# Altium PCB Board_routed.PcbDoc (part 1 of 4)
Units mm, origin at the board's own origin, x right, y up, seen from the top; angles counter-clockwise.
Board outline 115.4 x 92.5 mm, 2 copper layers (Top Layer, Bottom Layer); 95 components, 82 nets, 440 pads, 192 vias.
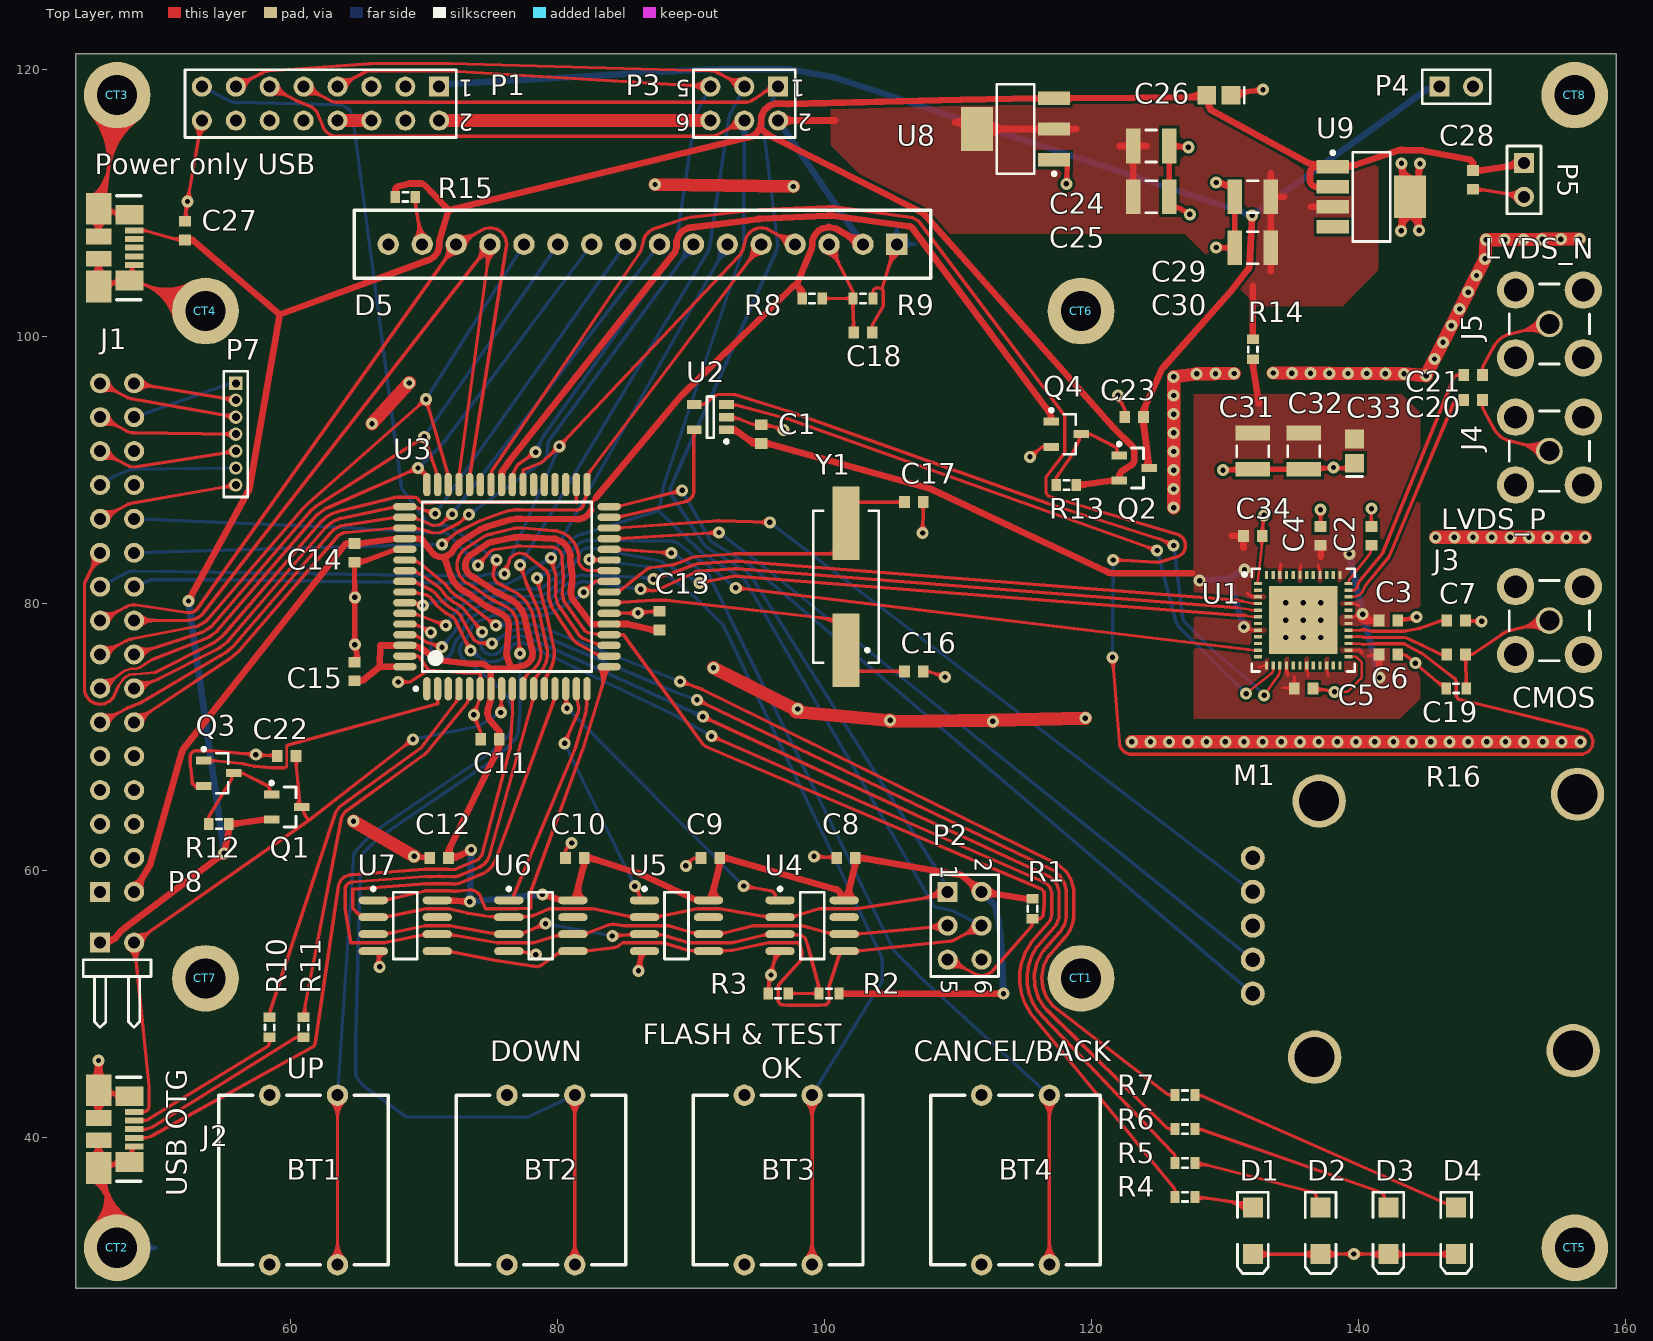
[diagram p0: Top Layer view]
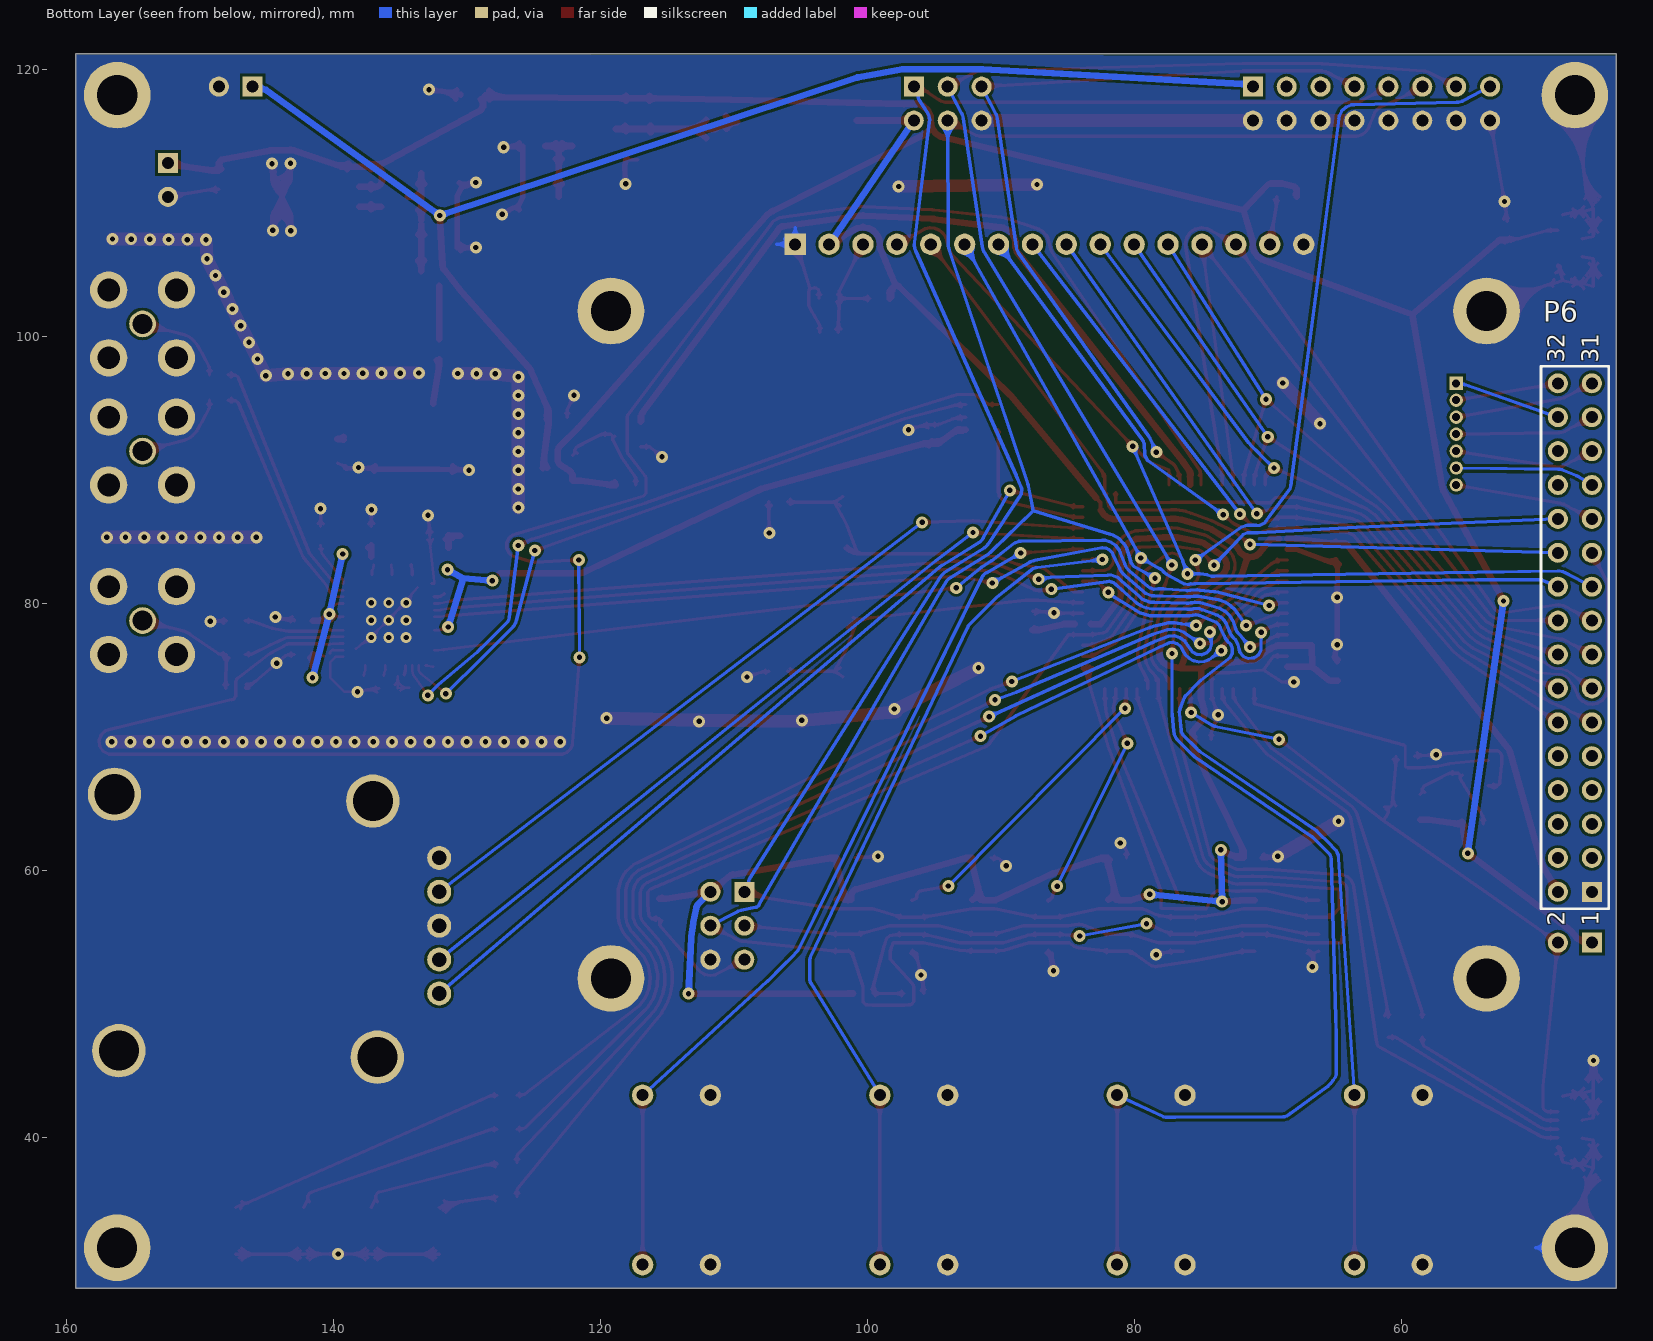
[diagram p1: Bottom Layer view, seen from below]

## Layer stack, top to bottom
Top Layer: signal copper 0.0356
Dielectric: dielectric 0.32, FR-4, Dk 4.8
Bottom Layer: signal copper 0.0356

## Board outline
43.9,28.7 159.3,28.7 159.3,121.2 43.9,121.2

## Design rules (kind name [scope] priority, off if disabled: settings)
Clearance [All] p1: gap=0.2
ComponentClearance [All] p1: gap=0.254 collisioncheckmode=3 verticalgap=0.254 showdistances=TRUE
HoleSize [All] p1: absolutevalues=TRUE maxlimit=5 minlimit=0.4 maxpercent=80.000 minpercent=20.000
PlaneClearance [All] p1: clearance=0.3
PolygonConnect [All] p1: connectstyle=Direct reliefconductorwidth=0.254 reliefentries=4 polygonreliefangle="45 Angle" airgapwidth=0.254
RoutingVias [All] p1: holewidth=0.4 width=0.9 viastyle="Through Hole" minholewidth=0.4 minwidth=0.9 maxholewidth=0.9 maxwidth=1.27
SilkscreenOverComponentPads [All] p1: minsilkscreentomaskgap=0.254
SolderMaskExpansion [All] p1: expansion=0.1
Width [All] p1: maxlimit=2 minlimit=0.2 preferedwidth=0.254
24 further rules are at their usual default settings.

## Classes and differential pairs
component class Connectors: BT1 BT2 BT3 BT4 C18 C19 C20 C21 CT1 CT2 CT3 CT4 CT5 CT6 CT7 CT8 D5 J1 J2 J3 J4 J5 M1 P1 P2 P3 P4 P5 P6 P7 P8 R8 R9 R10 R11 R16
component class ClockTamerMotherboard: C8 C9 C10 C11 C12 C13 C14 C15 C16 C17 D1 D2 D3 D4 R1 R2 R3 R4 R5 R6 R7 U3 U4 U5 U6 U7 Y1
component class Power: C22 C23 C24 C25 C26 C27 C28 C29 C30 C31 C32 C33 C34 Q1 Q2 Q3 Q4 R12 R13 R14 R15 U8 U9
component class ClockDiv: C1 C2 C3 C4 C5 C6 C7 U1 U2

## Components (designator, comment, footprint, x,y, rotation, side; value= is the part's Value field where it differs from the comment)
BT1 "DTS24N" DTS24N 63.5,30.48 r0 top
BT2 "DTS24N" DTS24N 81.28,30.48 r0 top
BT3 "DTS24N" DTS24N 99.06,30.48 r0 top
BT4 "DTS24N" DTS24N 116.84,30.48 r0 top
C1 "Cap Semi" 1608[0603] 95.25,92.71 r270 top
C2 "Cap Semi" 1608[0603] 140.97,85.09 r270 top
C3 "Cap Semi" 1608[0603] 142.24,78.74 r180 top
C4 "Cap Semi" 1608[0603] 137.16,85.09 r270 top
C5 "Cap Semi" 1608[0603] 135.89,73.66 r180 top
C6 "Cap Semi" 1608[0603] 142.24,76.2 r180 top
C7 "Cap Semi" 1608[0603] 147.32,78.74 r180 top
C8 "Cap Semi" 1608[0603] 101.6,60.96 r0 top
C9 "Cap Semi" 1608[0603] 91.44,60.96 r0 top
C10 "Cap Semi" 1608[0603] 81.28,60.96 r0 top
C11 "Cap Semi" 1608[0603] 74.93,69.85 r0 top
C12 "Cap Semi" 1608[0603] 71.12,60.96 r0 top
C13 "Cap Semi" 1608[0603] 87.63,78.74 r90 top
C14 "Cap Semi" 1608[0603] 64.77,83.82 r90 top
C15 "Cap Semi" 1608[0603] 64.77,74.93 r270 top
C16 "Cap Semi" 1608[0603] 106.68,74.93 r180 top
C17 "Cap Semi" 1608[0603] 106.68,87.63 r180 top
C18 "Cap Semi" 1608[0603] 102.87,100.33 r0 top
C19 "Cap Semi" 1608[0603] 147.32,76.2 r180 top
C20 "Cap Semi" 1608[0603] 148.59,95.25 r180 top
C21 "Cap Semi" 1608[0603] 148.59,97.155 r180 top
C22 "Cap Semi" 1608[0603] 59.69,68.58 r180 top
C23 "Cap Semi" 1608[0603] 123.19,93.98 r180 top
C24 "Cap Semi" C1210 124.46,114.3 r180 top
C25 "Cap Semi" C1210 124.46,110.49 r180 top
C26 "Tantal" C2512 129.54,118.11 r180 top
C27 "Cap Semi" 1608[0603] 52.07,107.95 r90 top
C28 "Cap Semi" 1608[0603] 148.59,111.76 r270 top
C29 "Cap Semi" C1210 132.08,110.49 r0 top
C30 "Cap Semi" C1210 132.08,106.68 r0 top
C31 "Cap Semi" C1210 132.08,91.44 r90 top
C32 "Cap Semi" C1210 135.89,91.44 r90 top
C33 "Tantal" C2512 139.7,91.44 r90 top
C34 "Cap Semi" 1608[0603] 132.08,85.09 r0 top
CT1 "MTHOLE_3mm" MTHOLE 119.21,51.934 r0 top locked
CT2 "MTHOLE_3mm" MTHOLE 46.99,31.75 r0 top
CT3 "MTHOLE_3mm" MTHOLE 46.99,118.11 r0 top
CT4 "MTHOLE_3mm" MTHOLE 53.61,101.934 r0 top locked
CT5 "MTHOLE_3mm" MTHOLE 156.21,31.75 r0 top
CT6 "MTHOLE_3mm" MTHOLE 119.21,101.934 r0 top locked
CT7 "MTHOLE_3mm" MTHOLE 53.61,51.934 r0 top locked
CT8 "MTHOLE_3mm" MTHOLE 156.2,118.11 r0 top
D1 "LED2" 3.2X1.6X1.1 132.08,33.02 r270 top
D2 "LED2" 3.2X1.6X1.1 137.16,33.02 r270 top
D3 "LED2" 3.2X1.6X1.1 142.24,33.02 r270 top
D4 "LED2" 3.2X1.6X1.1 147.32,33.02 r270 top
D5 "WH1604B" WH1604B 105.41,106.934 r0 top
J1 "47346-0001" USB_MICRO 48.26,106.68 r90 top
J2 "47346-0001" USB_MICRO 48.26,40.64 r90 top
J3 "SMA" SMA 154.305,78.74 r0 top
J4 "SMA" SMA 154.305,91.44 r0 top
J5 "SMA" SMA 154.305,100.965 r0 top
M1 "EPS1D-F19" EPS1D-F19 132.08,55.88 r270 top
P1 "Header 8X2" HDR2X8 71.12,118.745 r180 top
P2 "Header 3X2" HDR2X3 109.22,58.42 r270 top
P3 "Header 3X2" HDR2X3 96.52,118.745 r180 top
P4 "Header 2" HDR1X2 146.05,118.745 r0 top
P5 "Header 2" HDR1X2 152.4,113.03 r270 top
P6 "Header 16X2" HDR2X16 45.72,58.42 r90 bottom
P7 "MHDR1X7" MHDR1X7 55.88,96.52 r270 top
P8 "Header 2H" HDR1X2H 45.72,54.61 r0 top
Q1 "IRLML6402" SOT-23_N 59.69,64.77 r0 top
Q2 "IRLML6402" SOT-23_N 123.19,90.17 r0 top
Q3 "IRLML2502" SOT-23_N 54.61,67.31 r0 top
Q4 "IRLML2502" SOT-23_N 118.11,92.71 r0 top
R1 "Res3" J1-0603 115.57,57.15 r90 top
R2 "Res3" J1-0603 100.33,50.8 r180 top
R3 "Res3" J1-0603 96.52,50.8 r0 top
R4 "Res3" J1-0603 127,35.56 r180 top
R5 "Res3" J1-0603 127,38.1 r180 top
R6 "Res3" J1-0603 127,40.64 r180 top
R7 "Res3" J1-0603 127,43.18 r180 top
R8 "Res3" J1-0603 99.06,102.87 r180 top
R9 "Res3" J1-0603 102.87,102.87 r180 top
R10 "Res3" J1-0603 58.42,48.26 r90 top
R11 "Res3" J1-0603 60.96,48.26 r90 top
R12 "Res3" J1-0603 54.61,63.5 r0 top
R13 "Res3" J1-0603 118.11,88.9 r0 top
R14 "Res3" J1-0603 132.08,99.06 r90 top
R15 "Res3" J1-0603 68.58,110.49 r180 top
R16 "Res3" J1-0603 147.32,73.66 r180 top
U1 "LMK03000CISQ" SQ48A-04 135.86,78.77 r0 top
U2 "DS90LT012AQMF" MF05A_N 91.44,93.98 r180 top
U3 "AT90USB1287-AU" 64MD_N 76.2,81.28 r90 top
U4 "AT25256AN-10SQ-2.7" 8S1_N 99.06,55.88 r0 top
U5 "AT25256AN-10SQ-2.7" 8S1_N 88.9,55.88 r0 top
U6 "AT25256AN-10SQ-2.7" 8S1_N 78.74,55.88 r0 top
U7 "AT25256AN-10SQ-2.7" 8S1_N 68.58,55.88 r0 top
U8 "LM1117IMPX-3.3" MP04A_N 114.3,115.57 r180 top
U9 "LP3871EMP-3.3" MP05A_N 140.97,110.49 r0 top
Y1 "HC49/4H_SMX" HC49/4H_SMX 101.6,81.28 r90 top

## Footprints (in the part's own frame and the unit in brackets; to place one, negate y for a bottom-side part, rotate by r counter-clockwise, add the part's x,y. Pads: shape width x height; smd on the part's side, far side on the other; paste and mask are expansions set on the pad)
3.2X1.6X1.1 [mm] "SMT LED; 2 Flat Leads"
  rect 1.5x1.5 smd: 1(-1.75,0) 2(1.75,0)
  silkscreen extent -2.9,-1.15 3.2,1.15
8S1_N [mm] "SOIC, 8-Leads, Body 4.9x3.9mm, Pitch 1.27mm, IPC Medium Density"
  oval 2.2x0.6 smd: 1(-2.4,1.905) 2(-2.4,0.635) 3(-2.4,-0.635) 4(-2.4,-1.905) 5(2.4,-1.905) 6(2.4,-0.635) 7(2.4,0.635) 8(2.4,1.905)
  silkscreen extent -2.52,-2.5 0.9,2.88, body extent -2,-2.5 2,2.5, height 1.75
64MD_N [mm] "Thin QFP, 64-Leads, Body 14x14mm, Pitch 0.8mm, IPC Medium Density"
  oval 1.75x0.55 smd: 1(-7.65,6) 2(-7.65,5.2) 3(-7.65,4.4) 4(-7.65,3.6) 5(-7.65,2.8) 6(-7.65,2) 7(-7.65,1.2) 8(-7.65,0.4) 9(-7.65,-0.4) 10(-7.65,-1.2) 11(-7.65,-2) 12(-7.65,-2.8) 13(-7.65,-3.6) 14(-7.65,-4.4) 15(-7.65,-5.2) 16(-7.65,-6) 33(7.65,-6) 34(7.65,-5.2) 35(7.65,-4.4) 36(7.65,-3.6) 37(7.65,-2.8) 38(7.65,-2) 39(7.65,-1.2) 40(7.65,-0.4) 41(7.65,0.4) 42(7.65,1.2) 43(7.65,2) 44(7.65,2.8) 45(7.65,3.6) 46(7.65,4.4) 47(7.65,5.2) 48(7.65,6)
  oval 0.55x1.75 smd: 17(-6,-7.65) 18(-5.2,-7.65) 19(-4.4,-7.65) 20(-3.6,-7.65) 21(-2.8,-7.65) 22(-2,-7.65) 23(-1.2,-7.65) 24(-0.4,-7.65) 25(0.4,-7.65) 26(1.2,-7.65) 27(2,-7.65) 28(2.8,-7.65) 29(3.6,-7.65) 30(4.4,-7.65) 31(5.2,-7.65) 32(6,-7.65) 49(6,7.65) 50(5.2,7.65) 51(4.4,7.65) 52(3.6,7.65) 53(2.8,7.65) 54(2,7.65) 55(1.2,7.65) 56(0.4,7.65) 57(-0.4,7.65) 58(-1.2,7.65) 59(-2,7.65) 60(-2.8,7.65) 61(-3.6,7.65) 62(-4.4,7.65) 63(-5.2,7.65) 64(-6,7.65)
  silkscreen extent -7.77,-6.35 6.35,6.95, body extent -7,-7 7,7, height 1.2
1608[0603] [mm] "Chip Capacitor, Body 1.6x0.8mm, IPC High Density"
  rect 0.8x0.9 smd: 1(-0.7,0) 2(0.7,0)
  body extent -0.87,-0.48 0.87,0.48, height 1.3
C1210 [mm] "Chip Capacitor, Body 3.2x2.5mm, IPC High Density"
  rect 1.1x2.6 smd: 1(-1.35,0) 2(1.35,0)
  silkscreen extent -0.4,-1.2 0.4,1.2, body extent -1.7,-1.35 1.7,1.35, height 1.3
C2512 [mm] "Chip Capacitor, Body 2.54x1.27mm, IPC High Density"
  rect 1.4x1.4 smd: 1(-0.9,0) 2(0.9,0)
  silkscreen extent -1.9,-0.6 -1.9,0.6, body extent -1.45,-0.82 1.45,0.82, height 1.3
DTS24N [mm]
  round 1.6 hole 0.9: 1(0,12.7) 2(0,0) 3(-5.08,12.7) 4(-5.08,0)
  silkscreen extent -8.89,0 3.81,12.7
EPS1D-F19 [mm]
  round 1.8 hole 1.1: 1(5.08,0) 2(2.54,0) 3(0,0) 4(-2.54,0) 5(-5.08,0)
  round 4 hole 3: DP0(-9.34,4.97) DP1(-9.85,24.33) DP2(9.36,24) DP3(9.85,4.63)
HC49/4H_SMX [mm] "Surface Mount Quartz Crystal; Body 13.4 (inc. leads) x 4.9 mm (LxW max)"
  rect 5.5x2 smd: 1(-4.75,0) 2(4.75,0)
  silkscreen extent -5.7,-2.45 5.7,2.45
HDR1X2 [mm] "Connector; Header; 2 Position"
  rect 1.5x1.5 hole 0.9: 1(0,0)
  round 1.5 hole 0.9: 2(2.54,0)
  silkscreen extent -1.27,-1.27 3.81,1.27
HDR1X2H [mm] "Connector; Header; 2 Position; Right Angle"
  rect 1.5x1.5 hole 0.9: 1(0,0)
  round 1.5 hole 0.9: 2(2.54,0)
  silkscreen extent -1.27,-6.35 3.81,-1.27
HDR2X3 [mm] "Connector; Header; 3x2 Position"
  rect 1.5x1.5 hole 0.9: 1(0,0)
  round 1.5 hole 0.9: 2(0,2.54) 3(2.54,0) 4(2.54,2.54) 5(5.08,0) 6(5.08,2.54)
  silkscreen extent -1.27,-1.27 6.35,3.81
HDR2X8 [mm] "Connector; Header; 8x2 Position"
  rect 1.5x1.5 hole 0.9: 1(0,0)
  round 1.5 hole 0.9: 2(0,2.54) 3(2.54,0) 4(2.54,2.54) 5(5.08,0) 6(5.08,2.54) 7(7.62,0) 8(7.62,2.54) 9(10.16,0) 10(10.16,2.54) 11(12.7,0) 12(12.7,2.54) 13(15.24,0) 14(15.24,2.54) 15(17.78,0) 16(17.78,2.54)
  silkscreen extent -1.27,-1.27 19.05,3.81
HDR2X16 [mm] "Connector; Header; 16x2 Position"
  rect 1.5x1.5 hole 0.9: 1(0,0)
  round 1.5 hole 0.9: 2(0,2.54) 3(2.54,0) 4(2.54,2.54) 5(5.08,0) 6(5.08,2.54) 7(7.62,0) 8(7.62,2.54) 9(10.16,0) 10(10.16,2.54) 11(12.7,0) 12(12.7,2.54) 13(15.24,0) 14(15.24,2.54) 15(17.78,0) 16(17.78,2.54) 17(20.32,0) 18(20.32,2.54) 19(22.86,0) 20(22.86,2.54) 21(25.4,0) 22(25.4,2.54) 23(27.94,0) 24(27.94,2.54) 25(30.48,0) 26(30.48,2.54) 27(33.02,0) 28(33.02,2.54) 29(35.56,0) 30(35.56,2.54) 31(38.1,0) 32(38.1,2.54)
  silkscreen extent -1.27,-1.27 39.37,3.81
J1-0603 [mm] "Chip Resistor, Body 1.6x0.8mm, IPC High Density"
  rect 0.7x0.9 smd: 1(-0.75,0) 2(0.75,0)
  silkscreen extent -0.2,-0.35 0.2,0.35, body extent -0.85,-0.48 0.85,0.48, height 0.9
MF05A_N [mm] "SOT23, 5-Leads, Body 2.9x1.6mm, Pitch 0.95mm, Lead Span 2.8mm, IPC Medium Density"
  rect 1.1x0.65 smd: 1(-1.2,0.95) 2(-1.2,0) 3(-1.2,-0.95) 4(1.2,-0.95) 5(1.2,0.95)
  silkscreen extent -1.33,-1.55 0.25,1.95, body extent -0.9,-1.55 0.9,1.55, height 1.19
MHDR1X7 [mm] "Connector; Header; 7 Position"
  rect 1x1 hole 0.6: 1(0,0)
  round 1 hole 0.6: 2(1.27,0) 3(2.54,0) 4(3.81,0) 5(5.08,0) 6(6.35,0) 7(7.62,0)
  silkscreen extent -0.9,-0.9 8.52,0.9
MP04A_N [mm] "SOT223, 4-Leads, Body 6.5x3.5mm, Pitch 2.3mm, Lead Span 7mm, IPC Medium Density"
  rect 2.4x1 smd: 1(-2.9,2.3) 2(-2.9,0) 3(-2.9,-2.3)
  rect 2.4x3.3 smd: 4(2.9,0)
  silkscreen extent -3.03,-3.35 1.4,3.47, body extent -1.85,-3.35 1.85,3.35, height 1.8
MP05A_N [mm] "SOT223, 5-Leads, Body 6.5x3.5mm, Pitch 1.5mm, Lead Span 7mm, IPC Medium Density"
  rect 2.4x1 smd: 1(-2.9,2.25) 2(-2.9,0.75) 3(-2.9,-0.75) 4(-2.9,-2.25)
  rect 2.4x3.2 smd: 5(2.9,0)
  silkscreen extent -3.02,-3.35 1.4,3.42, body extent -1.85,-3.35 1.85,3.35, height 1.8
MTHOLE [mm]
  round 5 hole 3: 1(0,0)
SMA [mm]
  round 2 hole 1.5: 1(0,0)
  round 2.8 hole 1.7: 2(-2.54,-2.54) 3(2.54,-2.54) 4(2.54,2.54) 5(-2.54,2.54)
  silkscreen extent -3,-3 3,3
SOT-23_N [mm] "SOT23, 3-Leads, Body 2.9x1.3mm, Pitch 0.95mm, Lead Span 2.3mm, IPC Medium Density"
  rect 1.15x0.6 smd: 1(-1.125,0.95) 2(-1.125,-0.95) 3(1.125,0)
  silkscreen extent -1.25,-1.5 0.7,1.92, body extent -0.7,-1.5 0.7,1.5, height 1.11
SQ48A-04 [mm]
  rect 0.6x0.25 smd paste-0.125 mask+0.075: 1(-3.4,2.75) 2(-3.4,2.25) 3(-3.4,1.75) 4(-3.4,1.25) 5(-3.4,0.75) 6(-3.4,0.25) 7(-3.4,-0.25) 8(-3.4,-0.75) 9(-3.4,-1.25) 10(-3.4,-1.75) 11(-3.4,-2.25) 12(-3.4,-2.75) 25(3.4,-2.75) 26(3.4,-2.25) 27(3.4,-1.75) 28(3.4,-1.25) 29(3.4,-0.75) 30(3.4,-0.25) 31(3.4,0.25) 32(3.4,0.75) 33(3.4,1.25) 34(3.4,1.75) 35(3.4,2.25) 36(3.4,2.75)
  rect 0.25x0.6 smd paste-0.125 mask+0.075: 13(-2.75,-3.4) 14(-2.25,-3.4) 15(-1.75,-3.4) 16(-1.25,-3.4) 17(-0.75,-3.4) 18(-0.25,-3.4) 19(0.25,-3.4) 20(0.75,-3.4) 21(1.25,-3.4) 22(1.75,-3.4) 23(2.25,-3.4) 24(2.75,-3.4) 37(2.75,3.4) 38(2.25,3.4) 39(1.75,3.4) 40(1.25,3.4) 41(0.75,3.4) 42(0.25,3.4) 43(-0.25,3.4) 44(-0.75,3.4) 45(-1.25,3.4) 46(-1.75,3.4) 47(-2.25,3.4) 48(-2.75,3.4)
  rect 5.1x5.1 smd paste-2.55: 49(0,0)
  silkscreen extent -4.52,-3.85 3.85,3.85, body extent -3.55,-3.55 3.55,3.55, height 0.8
USB_MICRO [mm]
  rect 0.45x1.38 smd: 1(1.3,0) 2(0.65,0) 3(0,0) 4(-0.65,0) 5(-1.3,0)
  rect 1.475x2.1 smd: DP0(-2.462,0.36) DP5(2.462,0.36)
  rect 2.375x1.9 smd: DP1(-2.913,2.66) DP4(2.913,2.66)
  rect 1.175x1.9 smd: DP2(-0.837,2.66) DP3(0.837,2.66)
  silkscreen extent -3.9,-0.5 3.9,1.3
WH1604B [mm]
  rect 1.6x1.6 hole 0.9: 1(0,0)
  round 1.6 hole 0.9: 2(-2.54,0) 3(-5.08,0) 4(-7.62,0) 5(-10.16,0) 6(-12.7,0) 7(-15.24,0) 8(-17.78,0) 9(-20.32,0) 10(-22.86,0) 11(-25.4,0) 12(-27.94,0) 13(-30.48,0) 14(-33.02,0) 15(-35.56,0) 16(-38.1,0)
  silkscreen extent -40.64,-2.54 2.54,2.54, body extent -54.53,-57.63 16.43,2.67, height 15

## Part data
C1 C2 C3 C4 C5 C6 C7 C8 C9 C10 C11 C12 C13 C14 C15 C16 C17 C18 C19 C20 C21 C22 C23 C24 C25 C27 C28 C29 C30 C31 C32 C34: "Capacitor (Semiconductor SIM Model)"
C26 C33: library part "Cap Semi", "Capacitor (Semiconductor SIM Model)"
D1 D2 D3 D4: "Typical RED, GREEN, YELLOW, AMBER GaAs LED"
J1 J2: "Micro USB Molex"
P1: "Header, 8-Pin, Dual row"
P2 P3: "Header, 3-Pin, Dual row"
P4 P5: "Header, 2-Pin"
P6: "Header, 16-Pin, Dual row"
P7: "Header, 7-Pin"
P8: "Header, 2-Pin, Right Angle"
Q1 Q2: library part IRLML6302, "HEXFET Power MOSFET"
Q3 Q4: library part IRLML2402, "HEXFET Power MOSFET"
R1 R2 R3 R4 R5 R6 R7 R8 R9 R10 R11 R12 R13 R14 R15 R16: "Resistor"
U1: library part LMK03001CISQ, "Precision Clock Conditioner with Integrated VCO"
U2: "Automotive LVDS Differential Line Receiver, 5-pin SOT-23"
U3: "8-bit AVR Microcontroller, 2.7-5.5V, 128KB Flash, 4KB EEPROM, 8KB SRAM, USB OTG Host, 64-pin TQFP, Industrial Grade (-40°C to 85°C)"
U4 U5 U6 U7: "256Kbit (32,768 x 8), SPI Bus Serial Automotive EEPROM, supports Mode 0 and 3 operation, 2.7V, 8-Pin SOIC"
U8: "800mA Low-Dropout Linear Regulator, 4-pin SOT-223"
U9: "0.8A Fast Ultra Low Dropout Linear Regulators, 5-pin SOT-223"
Y1: "Surface Mount Quartz Crystal"

## Via types
v1: diameter 0.9, hole 0.4, Top Layer to Bottom Layer, 183 vias
v2: diameter 0.8, hole 0.4, Top Layer to Bottom Layer, tented top, 9 vias

## Nets (pads, with @x,y where several pads share a name; then routed paths per layer and width w, separated by ;. In a path a pad name is that pad's centre, name@x,y a point inside that pad or via, vN(x,y) a via of type N, cw(c..) or ccw(c..) an arc to the next point about the centre after c; other vN are vias at no path point)
BTC: M1.1 U3.32 | length 64.7
  Top Layer w0.254: U3.32@83.85,87.28 84.323,87.28 84.45,87.28 84.467,87.28 84.501,87.284 84.517,87.288 v1(89.33,88.5) ; U3.32@84.526,87.407 ccw(c84.724,87.738) 84.818,87.364 ; U3.32@84.577,87.204 cw(c84.859,87.035) 84.779,87.354 ; v1@89.053,88.666 cw(c88.383,89.066) 88.574,88.31 cw(c88.764,87.553) v1@89.164,88.223
  Bottom Layer w0.254: v1(89.33,88.5) 91.324,84.914 91.378,84.816 91.533,84.653 91.628,84.594 94.385,82.888 94.449,82.848 94.569,82.76 94.627,82.711 M1.1@132.08,50.8
BTP0: BT1.1 BT1.2 U3.25 | length 77
  Top Layer w0.254: BT1.2@63.024,30.956 ccw(c61.875,32.105) 63.5,32.105 ccw(c65.125,32.105) BT1.2@63.976,30.956 ; BT1.1@63.024,42.704 cw(c61.875,41.555) 63.5,41.555 cw(c65.125,41.555) BT1.1@63.976,42.704 ; BT1.2@63.204,30.776 ccw(c62.488,31.492) 63.5,31.492 ccw(c64.512,31.492) BT1.2@63.796,30.776 ; BT1.1@63.204,42.884 cw(c62.488,42.168) 63.5,42.168 cw(c64.512,42.168) BT1.1@63.796,42.884 ; BT1.2@63.5,30.48 BT1.1@63.5,43.18 ; v1(81.95,80.861) 82.801,81.673 83.377,81.68 83.525,81.68 U3.25@83.85,81.68 ; v1@81.958,81.184 ccw(c81.976,81.964) 82.514,81.4 ccw(c83.053,80.836) v1@82.273,80.854 ; 82.889,81.674 ccw(c82.885,82.037) U3.25@83.144,81.783 ; 82.896,81.675 cw(c82.9,81.322) U3.25@83.147,81.574
  Bottom Layer w0.254: BT1.1@63.5,43.18 64.703,60.944 64.718,61.159 64.895,61.547 65.046,61.699 65.364,62.017 66.242,62.895 66.281,62.934 66.367,63.005 66.413,63.036 75.108,68.949 75.133,68.966 75.178,69.004 75.199,69.024 75.376,69.202 ; 75.201,74.076 76.124,73.153 76.17,73.107 76.242,72.997 76.265,72.936 76.558,72.175 76.596,72.079 76.623,71.873 76.612,71.77 76.482,70.507 76.471,70.399 76.379,70.204 76.302,70.128 75.376,69.202 ; 75.201,74.076 75.059,74.217 75.045,74.231 75.016,74.257 75.001,74.269 72.978,75.84 72.837,75.95 72.672,76.264 72.65,76.618 72.776,76.95 72.902,77.075 72.906,77.079 73.019,77.192 73.205,77.456 73.273,77.603 73.571,78.242 73.639,78.387 73.869,78.608 74.017,78.67 75.063,79.107 75.166,79.149 75.387,79.175 75.497,79.157 75.504,79.156 75.628,79.136 75.884,79.114 76.01,79.114 78.445,79.111 78.835,79.111 79.581,79.32 79.914,79.523 81.351,80.401 81.509,80.498 81.804,80.723 81.94,80.851 v1(81.95,80.861)
BTP1: BT2.1 BT2.2 U3.26 | length 101.4
  Top Layer w0.254: v1@76.923,76.483 ccw(c76.322,76.98) 77.098,77.054 ccw(c77.874,77.128) v1@77.378,76.527 ; v1(77.172,76.278) 76.957,78.528 76.938,78.729 76.802,79.106 76.576,79.44 76.276,79.705 76.096,79.797 75.037,80.34 74.971,80.374 74.846,80.449 74.788,80.49 73.648,81.285 73.562,81.345 73.387,81.452 73.297,81.5 73.291,81.504 73.052,81.632 72.687,82.037 72.481,82.542 72.457,83.084 72.619,83.604 72.946,84.038 73.174,84.187 74.331,84.945 74.471,85.036 74.778,85.17 74.94,85.211 76.51,85.604 76.736,85.66 77.197,85.696 77.425,85.676 79.682,85.482 79.945,85.459 80.44,85.284 80.876,84.99 81.226,84.594 81.464,84.125 81.577,83.612 81.568,83.348 ; BT2.2@80.804,30.956 ccw(c79.655,32.105) 81.28,32.105 ccw(c82.905,32.105) BT2.2@81.756,30.956 ; BT2.1@80.804,42.704 cw(c79.655,41.555) 81.28,41.555 cw(c82.905,41.555) BT2.1@81.756,42.704 ; BT2.2@80.984,30.776 ccw(c80.268,31.492) 81.28,31.492 ccw(c82.292,31.492) BT2.2@81.576,30.776 ; BT2.1@80.984,42.884 cw(c80.268,42.168) 81.28,42.168 cw(c82.292,42.168) BT2.1@81.576,42.884 ; BT2.2@81.28,30.48 BT2.1@81.28,43.18 ; 81.568,83.348 81.561,83.182 81.678,82.872 81.905,82.633 82.208,82.499 82.374,82.496 83.245,82.48 83.25,82.48 83.377,82.48 U3.26@83.85,82.48 ; U3.26@83.143,82.377 ccw(c82.887,82.129) 82.893,82.486 ccw(c82.899,82.844) U3.26@83.147,82.587
  Bottom Layer w0.254: 66.251,62.12 65.438,61.307 65.353,61.223 65.258,61.002 65.255,60.882 64.905,48.955 64.885,48.251 64.88,48.076 64.863,47.483 64.863,47.479 64.863,47.474 64.863,47.464 64.862,47.451 64.862,47.215 64.862,44.836 64.862,44.737 64.924,44.547 64.983,44.467 65.094,44.315 65.235,44.121 65.248,44.103 65.279,44.067 65.296,44.05 65.315,44.031 65.316,44.029 65.458,43.887 65.476,43.869 65.513,43.837 65.534,43.822 68.305,41.814 68.467,41.696 68.546,41.639 68.733,41.578 68.83,41.577 76.938,41.522 77.567,41.518 77.636,41.517 77.772,41.547 77.836,41.576 BT2.1@81.28,43.18 ; 66.251,62.12 66.634,62.503 66.655,62.524 66.7,62.561 66.725,62.578 75.42,68.491 75.466,68.522 75.552,68.594 75.591,68.633 75.768,68.81 76.142,69.184 76.694,69.736 76.838,69.881 77.013,70.247 77.034,70.45 77.164,71.714 77.167,71.751 77.171,71.823 77.171,71.86 v1(77.172,76.278)
BTP2: BT3.1 BT3.2 U3.27 | length 76.5
  Top Layer w0.254: v1(82.389,83.317) 83.238,83.28 83.25,83.28 83.377,83.28 U3.27@83.85,83.28 ; v1@82.607,83.079 cw(c83.134,82.504) 83.168,83.283 cw(c83.202,84.062) v1@82.627,83.536 ; 82.892,83.295 ccw(c82.908,83.653) U3.27@83.15,83.389 ; 82.894,83.295 cw(c82.878,82.939) U3.27@83.141,83.18 ; BT3.2@98.584,30.956 ccw(c97.435,32.105) 99.06,32.105 ccw(c100.685,32.105) BT3.2@99.536,30.956 ; BT3.1@98.584,42.704 cw(c97.435,41.555) 99.06,41.555 cw(c100.685,41.555) BT3.1@99.536,42.704 ; BT3.2@98.764,30.776 ccw(c98.048,31.492) 99.06,31.492 ccw(c100.072,31.492) BT3.2@99.356,30.776 ; BT3.1@98.764,42.884 cw(c98.048,42.168) 99.06,42.168 cw(c100.072,42.168) BT3.1@99.356,42.884 ; BT3.2@99.06,30.48 BT3.1@99.06,43.18
  Bottom Layer w0.254: v1(82.389,83.317) 87.276,82.721 87.397,82.706 87.62,82.612 87.714,82.538 90.3,80.493 90.314,80.482 90.341,80.458 90.353,80.446 90.392,80.407 ; v1@82.588,83.063 cw(c83.068,82.449) 83.163,83.223 cw(c83.257,83.997) v1@82.643,83.516 ; 90.393,80.406 92.332,78.467 92.37,78.43 92.431,78.343 92.454,78.294 92.491,78.218 95.903,71.066 104.258,53.547 104.289,53.483 104.319,53.347 104.319,53.277 104.319,51.91 104.319,51.823 104.272,51.656 104.226,51.582 BT3.1@99.06,43.18
BTP3: BT4.1 BT4.2 U3.28 | length 79.2
  Top Layer w0.254: U3.28@83.85,84.08 84.323,84.08 84.45,84.08 84.469,84.079 v1(88.51,83.8) ; U3.28@84.547,83.968 cw(c84.783,83.697) 84.808,84.056 ; U3.28@84.562,84.177 ccw(c84.83,84.41) 84.805,84.056 ; v1@88.266,83.588 ccw(c87.678,83.076) 87.732,83.854 ccw(c87.786,84.632) v1@88.298,84.044 ; BT4.2@116.364,30.956 ccw(c115.215,32.105) 116.84,32.105 ccw(c118.465,32.105) BT4.2@117.316,30.956 ; BT4.1@116.364,42.704 cw(c115.215,41.555) 116.84,41.555 cw(c118.465,41.555) BT4.1@117.316,42.704 ; BT4.2@116.544,30.776 ccw(c115.828,31.492) 116.84,31.492 ccw(c117.852,31.492) BT4.2@117.136,30.776 ; BT4.1@116.544,42.884 cw(c115.828,42.168) 116.84,42.168 cw(c117.852,42.168) BT4.1@117.136,42.884 ; BT4.2@116.84,30.48 BT4.1@116.84,43.18
  Bottom Layer w0.254: v1(88.51,83.8) 91.078,82.32 91.191,82.254 91.369,82.064 91.426,81.948 105.172,54.079 105.194,54.032 105.254,53.949 105.291,53.913 105.636,53.566 106.357,52.846 107.431,51.771 ; v1@88.594,83.488 cw(c88.796,82.735) 89.186,83.411 cw(c89.575,84.086) v1@88.822,83.884 ; 107.432,51.771 107.473,51.73 107.493,51.711 BT4.1@116.84,43.18
CHA: M1.2 U3.29 | length 61.3
  Top Layer w0.254: U3.29@83.85,84.88 84.323,84.88 84.45,84.88 84.467,84.881 v1(92.09,85.34) ; U3.29@84.548,84.991 ccw(c84.786,85.259) 84.808,84.901 ; U3.29@84.561,84.782 cw(c84.827,84.546) 84.805,84.901 ; v1@91.848,85.554 cw(c91.265,86.071) 91.312,85.293 cw(c91.359,84.515) v1@91.876,85.098
  Bottom Layer w0.254: v1(92.09,85.34) 94.877,83.221 94.93,83.18 M1.2@132.08,53.34
CHB: M1.4 U3.30 | length 59.4
  Top Layer w0.254: U3.30@83.85,85.68 84.323,85.68 84.45,85.68 84.455,85.68 84.464,85.68 84.469,85.681 92.028,86.215 92.051,86.216 92.096,86.217 92.117,86.217 v1(95.893,86.101) ; U3.30@84.547,85.792 ccw(c84.783,86.063) 84.808,85.705 ; U3.30@84.562,85.583 cw(c84.83,85.35) 84.805,85.704 ; v1@95.658,85.88 ccw(c95.089,85.345) 95.113,86.125 ccw(c95.137,86.904) v1@95.672,86.336
  Bottom Layer w0.254: v1(95.893,86.101) M1.4@132.08,58.42
CLKIN0_N: C7.2 U1.29 | length 8
  Top Layer w0.2: U1.29@139.26,78.02 139.46,78.02 139.56,78.02 139.605,78.019 140.08,78
  Top Layer w0.254: 140.08,78 140.202,78.034 140.247,78.047 140.343,78.056 140.39,78.053 140.417,78.051 140.469,78.044 140.495,78.04 140.963,77.96 141.003,77.954 141.081,77.946 141.12,77.944 141.126,77.944 141.14,77.943 143.34,77.943 143.356,77.943 143.387,77.946 143.402,77.949 144.514,78.151 144.548,78.157 144.617,78.175 144.65,78.187 146.077,78.692 146.112,78.705 146.183,78.717 ; C7.2@146.366,78.841 cw(c146.183,78.914) 146.183,78.717 ; C7.2@146.385,78.602 ccw(c146.183,78.484) 146.183,78.717 ; C7.2@146.62,78.74 146.347,78.717 146.22,78.717 146.183,78.717
CLKIN0_P: C19.2 U1.28 | length 8.2
  Top Layer w0.2: U1.28@139.26,77.52 139.46,77.52 139.56,77.52 139.619,77.522 139.929,77.543 140.036,77.55 140.248,77.528 140.35,77.5
  Top Layer w0.254: 140.35,77.5 141.108,77.471 141.14,77.47 143.34,77.47 143.429,77.47 143.603,77.432 143.684,77.394 144.854,76.854 144.893,76.835 146.029,76.268 146.074,76.246 146.17,76.223 ; C19.2@146.369,76.092 ccw(c146.171,76.007) 146.17,76.223 ; C19.2@146.388,76.344 cw(c146.17,76.48) 146.17,76.223 ; C19.2@146.62,76.2 146.347,76.223 146.22,76.223 146.17,76.223
CLKIN1_N: C21.2 U1.35 | length 19.7
  Top Layer w0.2: U1.35@139.26,81.02 139.46,81.02 139.56,81.02 139.687,81.02 139.889,81.175 139.922,81.298 139.99,81.55
  Top Layer w0.254: 139.99,81.55 140.072,81.69 140.083,81.709 140.109,81.746 140.124,81.764 141.748,83.717 141.769,83.742 141.804,83.799 141.816,83.83 147.094,96.865 147.143,96.986 147.359,97.132 ; C21.2@147.658,97.298 cw(c147.36,97.482) 147.36,97.132 ; C21.2@147.679,96.981 ccw(c147.36,96.717) 147.36,97.132 ; C21.2@147.89,97.155 147.617,97.132 147.49,97.132 147.359,97.132
CLKIN1_P: C20.2 U1.34 | length 18.5
  Top Layer w0.2: U1.34@139.26,80.52 139.46,80.52 139.56,80.52 139.681,80.52 139.914,80.586 140.121,80.712 140.284,80.89 140.339,80.997 140.55,81.41
  Top Layer w0.254: 140.55,81.41 142.174,83.363 142.22,83.418 142.296,83.543 142.324,83.61 147.096,94.965 147.146,95.084 147.361,95.227 ; C20.2@147.657,95.393 cw(c147.361,95.574) 147.361,95.227 ; C20.2@147.679,95.077 ccw(c147.361,94.816) 147.361,95.227 ; C20.2@147.89,95.25 147.617,95.227 147.49,95.227 147.361,95.227
COUT_N: U1.15 U2.4 | length 56.3
  Top Layer w0.2: v1(132.935,73.144) 133.947,74.562 134.027,74.673 134.11,74.933 134.11,75.07 134.11,75.17 U1.15@134.11,75.37
  Top Layer w0.254: U2.4@90.24,94.93 90.663,94.93 90.79,94.93 90.84,94.93 ; U2.4@90.628,94.818 cw(c90.84,94.673) 90.84,94.93 ; U2.4@90.628,95.042 ccw(c90.84,95.187) 90.84,94.93 ; v1@125.844,84.257 ccw(c125.106,84.005) 125.449,84.705 ccw(c125.793,85.405) v1@126.045,84.667 ; v1(126.149,84.361) 125.306,84.775 125.277,84.789 125.216,84.814 125.185,84.824 116.713,87.515 116.681,87.526 97.402,94.383 97.35,94.401 93.317,95.663 93.287,95.672 93.223,95.682 93.19,95.682 92.09,95.682 92.024,95.682 91.897,95.642 91.843,95.603 90.978,94.99 90.937,94.961 90.84,94.93
  Bottom Layer w0.254: v1(126.149,84.361) 126.836,78.951 126.849,78.848 126.941,78.66 127.015,78.586 128.58,77.02 129.06,76.541 129.202,76.399 129.212,76.389 129.232,76.371 129.243,76.361 132.14,73.941 132.156,73.928 132.186,73.9 132.2,73.886 v1(132.935,73.144)
COUT_P: U1.14 U2.3 | length 52.8
  Top Layer w0.2: v1(131.577,73.268) 133.469,74.777 133.536,74.83 133.61,74.985 133.61,75.07 133.61,75.17 U1.14@133.61,75.37 ; 133.571,74.903 ccw(c133.236,75.064) U1.14@133.586,75.187
  Top Layer w0.254: U2.3@92.64,94.93 93.063,94.93 93.19,94.93 93.212,94.93 ; U2.3@92.964,94.759 cw(c93.366,94.064) 93.573,94.839 ; U2.3@93.036,94.829 cw(c93.211,94.726) 93.211,94.93 ; U2.3@93.036,95.031 ccw(c93.211,95.134) 93.211,94.93 ; v1@124.628,83.849 ccw(c123.923,83.515) 124.185,84.25 ccw(c124.447,84.984) v1@124.781,84.28 ; v1(124.919,83.988) 97.217,93.861 97.199,93.868 97.166,93.878 97.149,93.882 93.274,94.919 93.254,94.924 93.212,94.93
  Bottom Layer w0.254: v1(124.919,83.988) 126.317,78.726 126.356,78.576 126.513,78.305 126.623,78.195 126.977,77.84 128.668,76.149 128.81,76.007 128.814,76.003 v1(131.577,73.268)
CS_CT: P1.15 U3.10 | length 64
  Top Layer w0.254: v1@75.142,83.118 cw(c74.461,82.738) 75.212,82.525 cw(c75.962,82.313) v1@75.582,82.994 ; v1(75.424,83.276) 75.198,82.478 75.159,82.338 75.177,82.049 75.29,81.782 75.487,81.568 75.614,81.499 76.721,80.907 76.996,80.76 77.467,80.359 77.843,79.862 78.103,79.3 78.17,78.996 78.697,76.615 78.749,76.382 78.707,75.903 78.523,75.459 78.214,75.09 78.01,74.96 ; U3.10@77.4,73.63 77.4,74.103 77.4,74.23 77.4,74.282 77.437,74.377 77.472,74.416 77.836,74.814 77.875,74.857 77.962,74.929 78.01,74.96 ; U3.10@77.548,74.237 cw(c78.15,74.264) 77.705,74.671
  Bottom Layer w0.254: P1.15@53.34,118.745 55.335,117.702 55.455,117.639 55.717,117.571 55.851,117.568 63.529,117.382 63.739,117.377 64.13,117.221 64.444,116.939 64.64,116.566 64.667,116.358 68.284,88.822 68.294,88.742 68.355,88.592 68.403,88.528 69.828,86.621 69.832,86.616 70.114,86.232 70.241,86.058 70.627,85.869 70.841,85.874 71.293,85.884 71.525,85.889 71.97,85.751 72.159,85.616 v1(75.424,83.276) ; v1@75.105,83.223 ccw(c74.336,83.096) 74.79,83.73 ccw(c75.245,84.364) v1@75.372,83.594
CS_EE1: U3.14 U4.1 | length 26.4
  Top Layer w0.254: v1@80.447,72.36 ccw(c79.835,72.844) 80.609,72.935 ccw(c81.384,73.025) v1@80.9,72.413 ; U3.14@80.508,72.914 cw(c80.291,72.638) 80.639,72.679 ; U3.14@80.6,73.63 80.6,73.157 80.6,73.03 80.6,73.022 80.601,73.006 80.602,72.998 v1(80.7,72.16) ; 80.64,72.671 cw(c81.001,72.713) U3.14@80.716,72.938 ; v1(93.928,58.852) 95.933,58.506 96.086,58.479 96.287,58.241 96.287,58.085 96.287,57.958 U4.1@96.66,57.785 ; v1@94.115,58.588 cw(c94.564,57.951) 94.697,58.719 cw(c94.829,59.488) v1@94.192,59.038
  Bottom Layer w0.254: v1(80.7,72.16) v1(93.928,58.852)
CS_EE2: U3.15 U5.1 | length 21.4
  Top Layer w0.254: v1@80.401,69.843 ccw(c80.115,70.568) 80.83,70.257 ccw(c81.545,69.947) v1@80.82,69.661 ; v1(80.519,69.542) 81.504,71.811 81.562,71.942 81.586,72.227 81.552,72.366 81.408,72.965 81.404,72.981 81.4,73.014 81.4,73.03 81.4,73.157 U3.15@81.4,73.63 ; U3.15@81.323,72.904 cw(c81.15,72.621) 81.472,72.699 ; 81.481,72.663 cw(c81.854,72.753) U3.15@81.526,72.953 ; v1@85.739,58.52 cw(c85.681,58.075) 86.076,58.287 ; v1(85.78,58.84) 86.076,58.287 ; v1@86.07,58.697 ccw(c86.472,58.498) 86.076,58.287 ; 86.12,58.164 ccw(c86.818,58.338) U5.1@86.46,57.715 ; 86.132,58.119 ccw(c86.73,58.269) U5.1@86.465,57.712 ; U5.1@86.5,57.785 86.127,57.958 86.127,58.085 86.127,58.137 86.101,58.24 86.076,58.287
  Bottom Layer w0.254: v1(80.519,69.542) v1(85.78,58.84)
CS_EE3: U3.16 U6.1 | length 19
  Top Layer w0.254: U6.1@76.34,57.785 76.713,57.958 76.713,58.085 76.713,58.128 76.73,58.211 76.746,58.25 81.328,69.204 81.338,69.226 81.355,69.274 81.362,69.298 82.075,71.762 82.095,71.834 82.121,71.979 82.127,72.052 82.199,73.009 82.2,73.015 82.2,73.025 82.2,73.03 82.2,73.157 U3.16@82.2,73.63 ; U6.1@76.384,57.717 ccw(c75.948,58.39) 76.734,58.232 ; U6.1@76.385,57.718 ccw(c75.93,58.402) 76.736,58.24 ; U3.16@82.088,72.934 cw(c81.815,72.699) 82.174,72.672 ; 82.174,72.675 cw(c82.528,72.649) U3.16@82.296,72.918
CS_EE4: U3.17 U7.1 | length 37.3
  Top Layer w0.254: U7.1@66.18,57.785 66.853,57.785 66.98,57.785 66.997,57.785 67.03,57.789 67.047,57.793 70.089,58.485 70.118,58.491 70.177,58.496 70.207,58.494 70.288,58.489 70.34,58.485 70.443,58.484 70.494,58.486 70.715,58.494 70.731,58.494 70.813,58.494 70.846,58.494 71.115,58.498 71.128,58.497 71.238,58.495 71.26,58.494 71.272,58.493 71.318,58.49 71.41,58.487 71.456,58.488 71.773,58.494 71.78,58.494 71.83,58.494 71.926,58.488 71.976,58.482 71.982,58.482 72.085,58.47 72.288,58.466 72.388,58.475 73.348,58.554 73.486,58.565 73.755,58.502 73.991,58.36 74.173,58.151 74.227,58.023 74.594,57.162 77.001,57.15 77.998,57.165 77.972,58.205 77.97,58.287 77.996,58.449 78.025,58.527 81.863,69.052 81.887,69.121 83.658,74.879 83.668,74.91 83.677,74.973 83.677,75.005 83.677,75.132 U3.17@83.85,75.28 ; U7.1@67.072,57.931 ccw(c67.308,58.306) 67.406,57.874 ; U7.1@67.126,57.693 cw(c67.458,57.484) 67.371,57.866 ; U3.17@83.119,75.211 cw(c81.271,74.232) 83.27,73.617 ; U3.17@83.344,75.33 cw(c82.038,74.638) 83.45,74.203 ; U3.17@83.568,75.448 cw(c82.804,75.044) 83.63,74.79 ; 83.635,74.805 cw(c84.193,74.634) 83.919,75.149 ccw(c84.191,74.635) 83.636,74.806 ; 83.639,74.817 cw(c84.169,74.654) U3.17@83.917,75.148
D_RS: D5.4 P6.19 U3.18 U3.39 | length 96.4
  Top Layer w0.254: v1@75.877,82.54 ccw(c75.548,83.247) 76.281,82.98 ccw(c77.013,82.713) v1@76.307,82.383 ; v1(76.014,82.247) 76.362,83.202 76.434,83.4 76.742,83.687 77.147,83.803 77.56,83.722 77.726,83.592 78.985,82.608 79.142,82.485 79.318,82.127 79.32,81.927 79.326,80.845 79.328,80.463 79.552,79.73 79.764,79.41 81.039,77.49 81.157,77.312 81.472,77.021 81.659,76.917 82.774,76.298 82.789,76.289 83.121,76.112 83.15,76.096 83.216,76.08 83.25,76.08 83.377,76.08 U3.18@83.85,76.08 ; U3.39@77.295,89.635 ccw(c77.043,89.887) 77.4,89.887 ccw(c77.757,89.887) U3.39@77.505,89.635 ; U3.39@77.4,88.93 77.4,89.255 77.4,89.403 77.4,90.011 78.685,90.544 78.756,90.573 78.886,90.657 78.943,90.709 v1(80.126,91.8) 93.603,106.092 93.708,106.203 93.856,106.47 93.895,106.617 94.065,107.251 94.113,107.431 94.312,107.746 94.598,107.99 94.941,108.136 95.312,108.173 95.678,108.099 95.843,108.008 D5.4@97.79,106.934 ; v1@79.803,91.813 cw(c79.024,91.844) 79.553,91.271 cw(c80.082,90.698) v1@80.113,91.477 ; v1@80.117,92.123 ccw(c80.094,92.902) 80.661,92.367 ccw(c81.229,91.832) v1@80.449,91.809 ; 82.851,76.256 ccw(c83.071,76.669) U3.18@83.207,76.222 ; 82.988,76.183 cw(c82.872,75.965) U3.18@83.108,76.037 ; D5.4@97.143,106.747 ccw(c95.583,106.296) 96.367,107.719 ccw(c97.152,109.141) D5.4@97.603,107.581 ; D5.4@97.387,106.818 ccw(c96.416,106.537) 96.904,107.423 ccw(c97.393,108.308) D5.4@97.674,107.337
  Bottom Layer w0.254: P6.19@45.72,81.28 47.715,82.323 47.845,82.391 48.131,82.459 48.277,82.457 54.32,82.368 54.322,82.368 74.017,82.051 74.08,82.05 74.205,82.067 74.266,82.085 74.531,82.164 75.08,82.244 75.357,82.245 ; v1@75.757,82.443 cw(c75.356,82.751) 75.357,82.245 ; v1@75.758,82.049 ccw(c75.359,81.739) 75.357,82.245 ; v1@75.877,82.54 ccw(c75.548,83.247) 76.281,82.98 ccw(c77.013,82.713) v1@76.307,82.383 ; v1@79.825,91.682 cw(c79.099,91.398) 79.813,91.086 cw(c80.528,90.773) v1@80.244,91.499 ; v1(80.126,91.8) 76.382,83.254 76.362,83.202 v1(76.014,82.247) 75.357,82.245
DD0: D5.7 P6.12 U3.51 | length 69
  Top Layer w0.254: P6.12@48.26,71.12 55.279,75.79 55.58,75.99 56.13,76.476 56.364,76.749 63.39,84.92 63.545,85.101 63.971,85.32 64.208,85.342 67.852,85.676 67.877,85.678 67.926,85.68 67.95,85.68 68.077,85.68 U3.51@68.55,85.68 69.023,85.68 69.15,85.68 69.163,85.68 69.189,85.678 69.201,85.675 69.913,85.54 69.936,85.536 69.982,85.524 70.004,85.516 70.362,85.395 70.631,85.304 71.194,85.34 71.447,85.463 72.46,85.956 72.519,85.985 72.63,86.062 72.678,86.109 72.728,86.158 72.835,86.254 72.893,86.303 ; P6.12@48.333,71.482 ccw(c48.508,72.355) 49.002,71.613 ccw(c49.495,70.872) P6.12@48.622,71.047 ; P6.12@48.383,71.731 ccw(c48.679,73.205) 49.512,71.953 ccw(c50.345,70.701) P6.12@48.871,70.997 ; 67.583,85.651 cw(c67.617,85.28) U3.51@67.855,85.566 ; 67.604,85.653 ccw(c67.573,85.994) U3.51@67.836,85.775 ; U3.51@69.233,85.558 cw(c69.444,85.249) 69.513,85.616 ; U3.51@69.272,85.763 ccw(c69.554,85.955) 69.49,85.62 ; v1@73.026,86.641 cw(c72.651,86.593) 72.893,86.303 ; v1@73.249,86.373 ccw(c73.136,86.013) 72.893,86.303 ; v1(73.346,86.682) 72.893,86.303
  Bottom Layer w0.254: v1(73.346,86.682) 78.861,90.642 79.024,90.759 79.215,91.112 79.225,91.312 79.25,91.842 79.256,91.971 79.343,92.215 79.42,92.32 D5.7@90.17,106.934 ; v1@73.398,87 ccw(c73.525,87.77) 73.979,87.136 ccw(c74.434,86.503) v1@73.665,86.629 ; D5.7@89.505,106.833 cw(c87.898,106.588) 89.207,105.625 cw(c90.516,104.662) D5.7@90.271,106.269 ; D5.7@89.756,106.871 cw(c88.756,106.719) 89.571,106.119 cw(c90.385,105.52) D5.7@90.233,106.52
DD1: D5.8 P6.11 U3.50 | length 64.1
  Top Layer w0.254: P6.11@45.72,71.12 47.715,72.163 47.739,72.176 47.791,72.2 47.818,72.211 48.702,72.569 48.742,72.585 48.82,72.624 48.857,72.646 54.749,76.112 55.086,76.31 55.686,76.811 55.944,77.11 62.97,85.281 63.177,85.522 63.734,85.832 64.048,85.88 67.908,86.477 67.918,86.478 67.939,86.48 67.95,86.48 68.077,86.48 U3.50@68.55,86.48 69.023,86.48 69.15,86.48 69.177,86.48 69.232,86.469 69.257,86.458 70.48,85.942 70.595,85.894 70.845,85.865 71.091,85.907 71.317,86.016 71.409,86.1 v1(72.09,86.716) ; P6.11@45.83,71.472 ccw(c46.097,72.322) 46.509,71.533 ccw(c46.922,70.743) P6.11@46.072,71.01 ; P6.11@45.906,71.715 ccw(c46.356,73.15) 47.053,71.817 ccw(c47.75,70.484) P6.11@46.315,70.934 ; 67.589,86.427 cw(c67.645,86.063) U3.50@67.863,86.361 ; 67.604,86.43 ccw(c67.551,86.772) U3.50@67.831,86.567 ; U3.50@69.206,86.343 cw(c69.368,85.943) 69.536,86.341 ; U3.50@69.287,86.536 ccw(c69.55,86.642) 69.439,86.381 ; v1@71.767,86.732 cw(c70.989,86.771) 71.512,86.193 cw(c72.035,85.614) v1@72.074,86.393
  Bottom Layer w0.254: v1(72.09,86.716) D5.8@87.63,106.934
DD2: D5.9 P6.14 U3.49 | length 58.5
  Top Layer w0.254: P6.14@48.26,73.66 50.018,74.333 50.032,74.338 50.057,74.349 50.07,74.356 54.234,76.461 54.602,76.647 55.256,77.159 55.524,77.471 62.549,85.642 62.672,85.785 62.963,86.03 63.289,86.224 63.643,86.363 63.83,86.403 67.892,87.274 67.906,87.277 67.936,87.28 67.95,87.28 68.077,87.28 U3.49@68.55,87.28 69.023,87.28 69.15,87.28 69.172,87.28 69.214,87.273 69.235,87.267 v1(70.821,86.75) ; P6.14@48.41,73.997 ccw(c48.774,74.81) 49.092,73.978 ccw(c49.41,73.146) P6.14@48.597,73.51 ; P6.14@48.514,74.229 ccw(c49.127,75.602) 49.665,74.197 ccw(c50.202,72.793) P6.14@48.829,73.406 ; 67.585,87.208 cw(c67.664,86.838) U3.49@67.87,87.156 ; 67.614,87.214 ccw(c67.543,87.543) U3.49@67.826,87.36 ; U3.49@69.217,87.148 cw(c69.4,86.789) 69.525,87.172 ; U3.49@69.282,87.347 ccw(c69.559,87.488) 69.463,87.192 ; v1@70.533,86.604 ccw(c69.838,86.25) 70.08,86.992 ccw(c70.321,87.733) v1@70.675,87.038
  Bottom Layer w0.254: v1(70.821,86.75) D5.9@85.09,106.934
DD3: D5.10 P6.13 U3.48 | length 60.4
  Top Layer w0.2: P6.13@45.72,73.66 47.402,74.861 47.588,74.995 48.029,75.137 48.26,75.137 48.419,75.137 48.723,75.23 48.854,75.318 49.57,75.8 ; P6.13@45.794,74.104 ccw(c45.972,75.176) 46.604,74.292 ccw(c47.236,73.408) P6.13@46.164,73.586 ; P6.13@45.827,74.301 ccw(c46.084,75.849) 46.997,74.572 ccw(c47.909,73.296) P6.13@46.361,73.553
  Top Layer w0.254: 49.57,75.8 53.469,77.331 53.822,77.47 54.437,77.907 54.683,78.194 61.709,86.365 61.961,86.657 62.581,87.117 62.935,87.272 v1(69.53,90.17) U3.48@70.09,89.75 ; v1@69.229,90.287 cw(c68.502,90.57) 68.816,89.856 cw(c69.13,89.142) v1@69.413,89.869 ; v1@69.579,89.851 cw(c69.649,89.392) U3.48@70.014,89.679 ; v1@69.601,89.855 cw(c69.732,89.272) U3.48@70.09,89.75 ; v1@69.768,89.992 cw(c69.328,89.405) U3.48@70.053,89.509 ; v1@69.851,90.131 ccw(c70.364,90.069) 69.957,89.75 ; v1@69.852,90.19 ccw(c70.448,90.228) U3.48@70.09,89.75 ; U3.48@70.2,88.93 70.2,89.403 70.2,89.53 70.2,89.595 70.142,89.711 U3.48@70.09,89.75
  Bottom Layer w0.254: v1(69.53,90.17) 70.008,90.619 70.022,90.632 70.322,90.933 ; 70.323,90.933 70.605,91.216 70.611,91.222 71.3,91.931 71.303,91.934 71.436,92.072 71.44,92.076 71.445,92.081 71.519,92.16 71.531,92.173 71.554,92.2 71.564,92.214 D5.10@82.55,106.934
DD4: D5.11 P6.16 U3.47 | length 55.8
  Top Layer w0.254: P6.16@48.26,76.2 53.13,77.798 53.46,77.906 54.038,78.293 54.263,78.555 61.289,86.726 61.478,86.946 61.916,87.327 62.163,87.485 v1(70.001,92.509) 70.985,89.619 70.993,89.597 71,89.553 71,89.53 71,89.403 U3.47@71,88.93 ; P6.16@48.427,76.529 ccw(c48.829,77.324) 49.106,76.478 ccw(c49.384,75.631) P6.16@48.589,76.033 ; P6.16@48.541,76.756 ccw(c49.22,78.098) 49.689,76.669 ccw(c50.158,75.24) P6.16@48.816,75.919 ; v1@69.685,92.578 cw(c68.923,92.744) 69.344,92.088 cw(c69.765,91.431) v1@69.932,92.193 ; v1@69.858,92.219 cw(c69.514,91.519) 70.252,91.771 cw(c70.99,92.022) v1@70.291,92.366 ; U3.47@70.867,89.595 ccw(c70.502,89.775) 70.887,89.907 ; 70.91,89.839 ccw(c71.201,89.938) U3.47@71.065,89.663
  Bottom Layer w0.254: v1(70.001,92.509) D5.11@80.01,106.934
DD5: D5.12 P6.15 U3.46 | length 59
  Top Layer w0.254: P6.15@45.72,76.2 47.715,77.243 47.79,77.283 47.951,77.339 48.036,77.356 52.715,78.261 53.045,78.325 53.626,78.662 53.843,78.916 60.869,87.087 60.971,87.205 61.188,87.426 61.307,87.531 v1(70.131,95.324) 71.789,89.607 71.795,89.588 71.8,89.549 71.8,89.53 71.8,89.403 U3.46@71.8,88.93 ; P6.15@45.83,76.552 ccw(c46.097,77.402) 46.509,76.613 ccw(c46.922,75.823) P6.15@46.072,76.09 ; P6.15@45.906,76.795 ccw(c46.356,78.23) 47.053,76.897 ccw(c47.75,75.564) P6.15@46.315,76.014 ; v1@69.808,95.344 cw(c69.03,95.392) 69.546,94.808 cw(c70.063,94.223) v1@70.111,95.001 ; v1@69.975,95.041 cw(c69.599,94.358) 70.348,94.575 cw(c71.097,94.792) v1@70.414,95.168 ; U3.46@71.67,89.601 ccw(c71.325,89.792) 71.704,89.901 ; 71.718,89.851 ccw(c72.026,89.94) U3.46@71.871,89.66
  Bottom Layer w0.254: v1(70.131,95.324) D5.12@77.47,106.934
DD6: D5.13 P6.18 U3.45 | length 71.1
  Top Layer w0.254: P6.18@48.26,78.74 52.352,78.779 52.512,78.781 52.827,78.856 53.117,78.999 53.368,79.203 53.468,79.332 D5.13@74.93,106.934 72.602,89.567 72.601,89.557 72.6,89.539 72.6,89.53 72.6,89.403 U3.45@72.6,88.93 ; P6.18@48.518,79.003 ccw(c49.142,79.639) 49.151,78.749 ccw(c49.159,77.858) P6.18@48.523,78.482 ; P6.18@48.696,79.185 ccw(c49.75,80.258) 49.764,78.754 ccw(c49.778,77.25) P6.18@48.705,78.304 ; U3.45@72.51,89.648 ccw(c72.298,89.925) 72.644,89.879 ; 72.646,89.89 ccw(c73.008,89.842) U3.45@72.718,89.62 ; D5.13@74.262,106.85 cw(c72.65,106.649) 73.933,105.651 cw(c75.215,104.654) D5.13@75.014,106.266 ; D5.13@74.395,106.526 cw(c73.104,105.539) 74.714,105.324 cw(c76.325,105.108) D5.13@75.338,106.399 ; D5.13@74.514,106.882 cw(c73.511,106.756) 74.309,106.135 cw(c75.108,105.515) D5.13@74.982,106.518 ; D5.13@74.597,106.68 cw(c73.793,106.066) 74.796,105.931 cw(c75.798,105.797) D5.13@75.184,106.601
DD7: D5.14 P6.17 U3.44 | length 76.8
  Top Layer w0.254: P6.17@45.72,78.74 47.715,79.783 47.881,79.87 48.249,79.932 48.433,79.904 52.209,79.343 52.33,79.325 52.571,79.356 52.794,79.451 52.983,79.603 53.053,79.702 D5.14@72.39,106.934 74.337,108.008 74.539,108.12 74.997,108.181 75.447,108.071 75.825,107.805 76.08,107.421 76.178,106.97 76.142,106.741 73.403,89.573 73.402,89.562 73.4,89.541 73.4,89.53 73.4,89.403 U3.44@73.4,88.93 ; P6.17@45.83,79.092 ccw(c46.097,79.942) 46.509,79.153 ccw(c46.922,78.363) P6.17@46.072,78.63 ; P6.17@45.906,79.335 ccw(c46.356,80.77) 47.053,79.437 ccw(c47.75,78.104) P6.17@46.315,78.554 ; D5.14@71.726,106.822 cw(c70.125,106.55) 71.449,105.609 cw(c72.774,104.669) D5.14@72.502,106.27 ; D5.14@71.977,106.864 cw(c70.98,106.695) 71.804,106.109 cw(c72.629,105.524) D5.14@72.46,106.521 ; D5.14@72.506,107.337 ccw(c72.787,108.308) 73.276,107.423 ccw(c73.764,106.537) D5.14@72.793,106.818 ; D5.14@72.577,107.581 ccw(c73.028,109.141) 73.813,107.719 ccw(c74.597,106.296) D5.14@73.037,106.747 ; U3.44@73.313,89.65 ccw(c73.11,89.93) 73.452,89.875 ; 73.454,89.892 ccw(c73.819,89.834) U3.44@73.52,89.617
DM0: P6.28
DM1: P6.26